# Altium PCB PCB.ST_LINK.FR.PcbDoc
Units mm, origin at the board's own origin, x right, y up, seen from the top; angles counter-clockwise.
Board outline 167.13 x 113.79 mm, 2 copper layers (Top Layer, Bottom Layer); 68 components, 53 nets, 201 pads, 24 vias.
Unrouted connection lines stored in the file: 45.
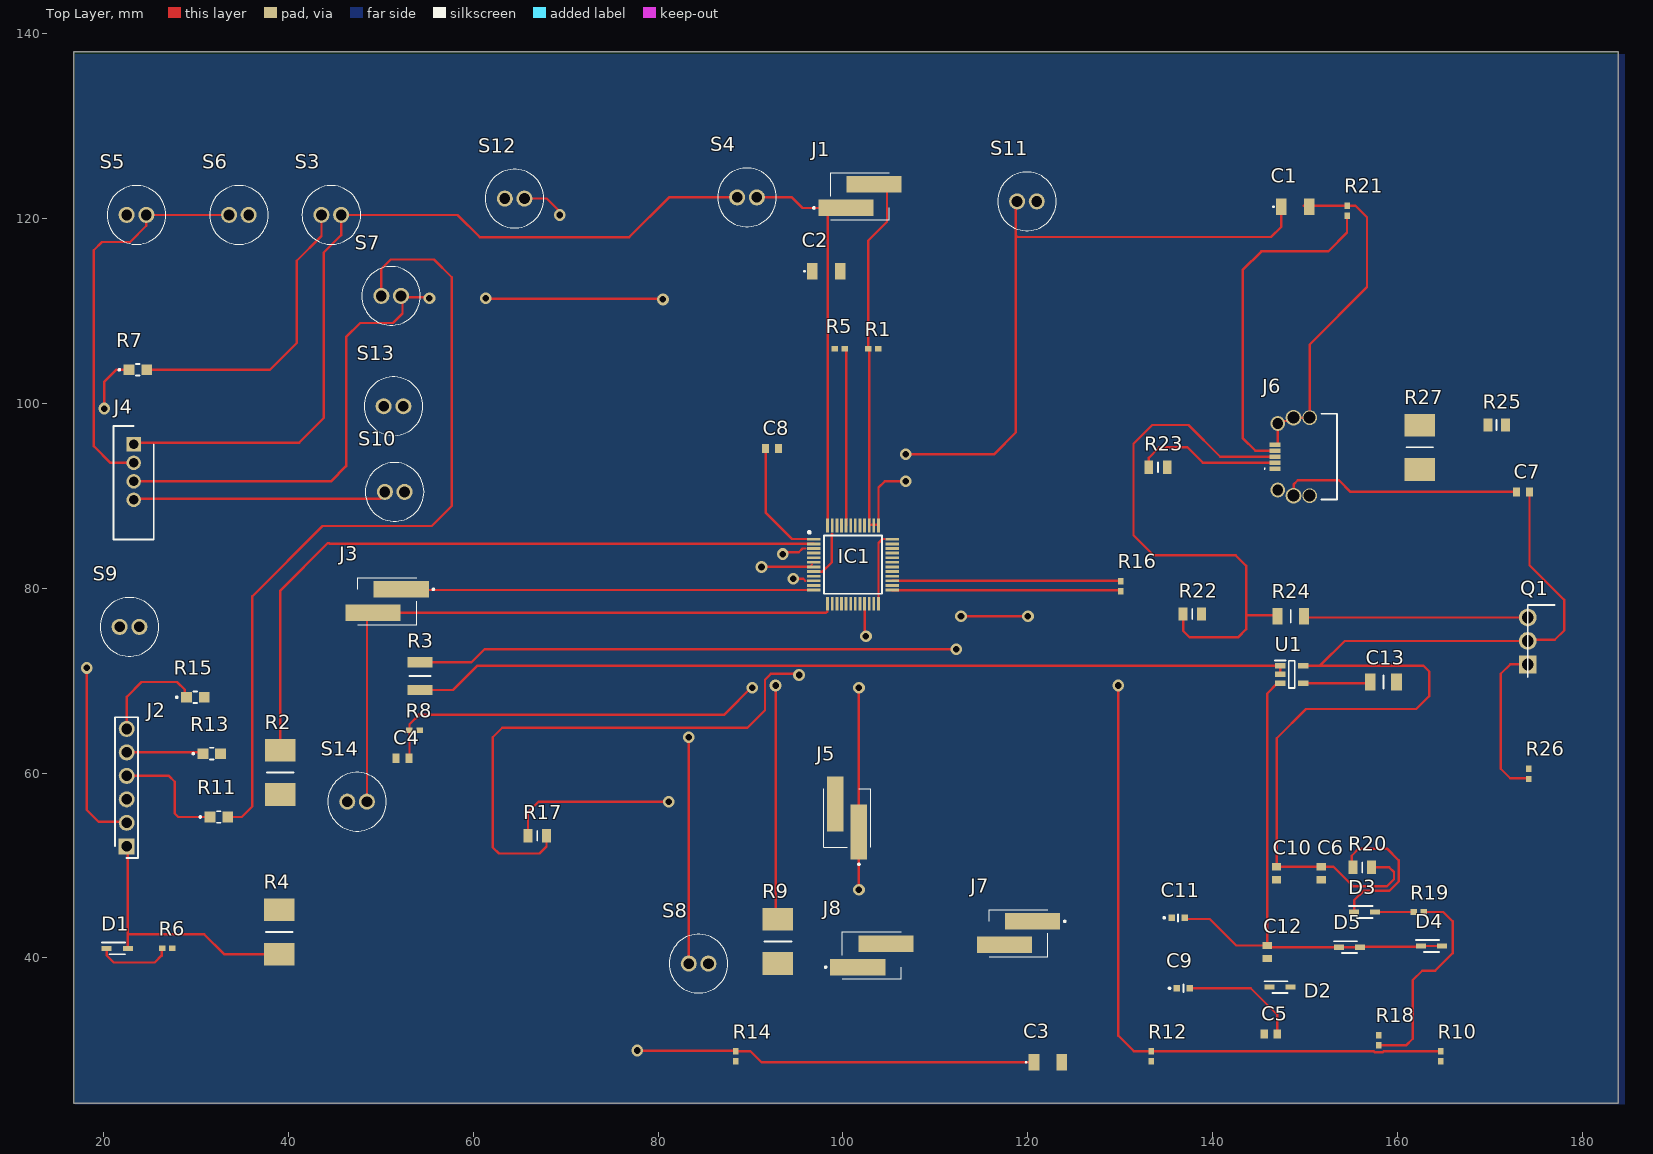
[diagram p0: Top Layer view]
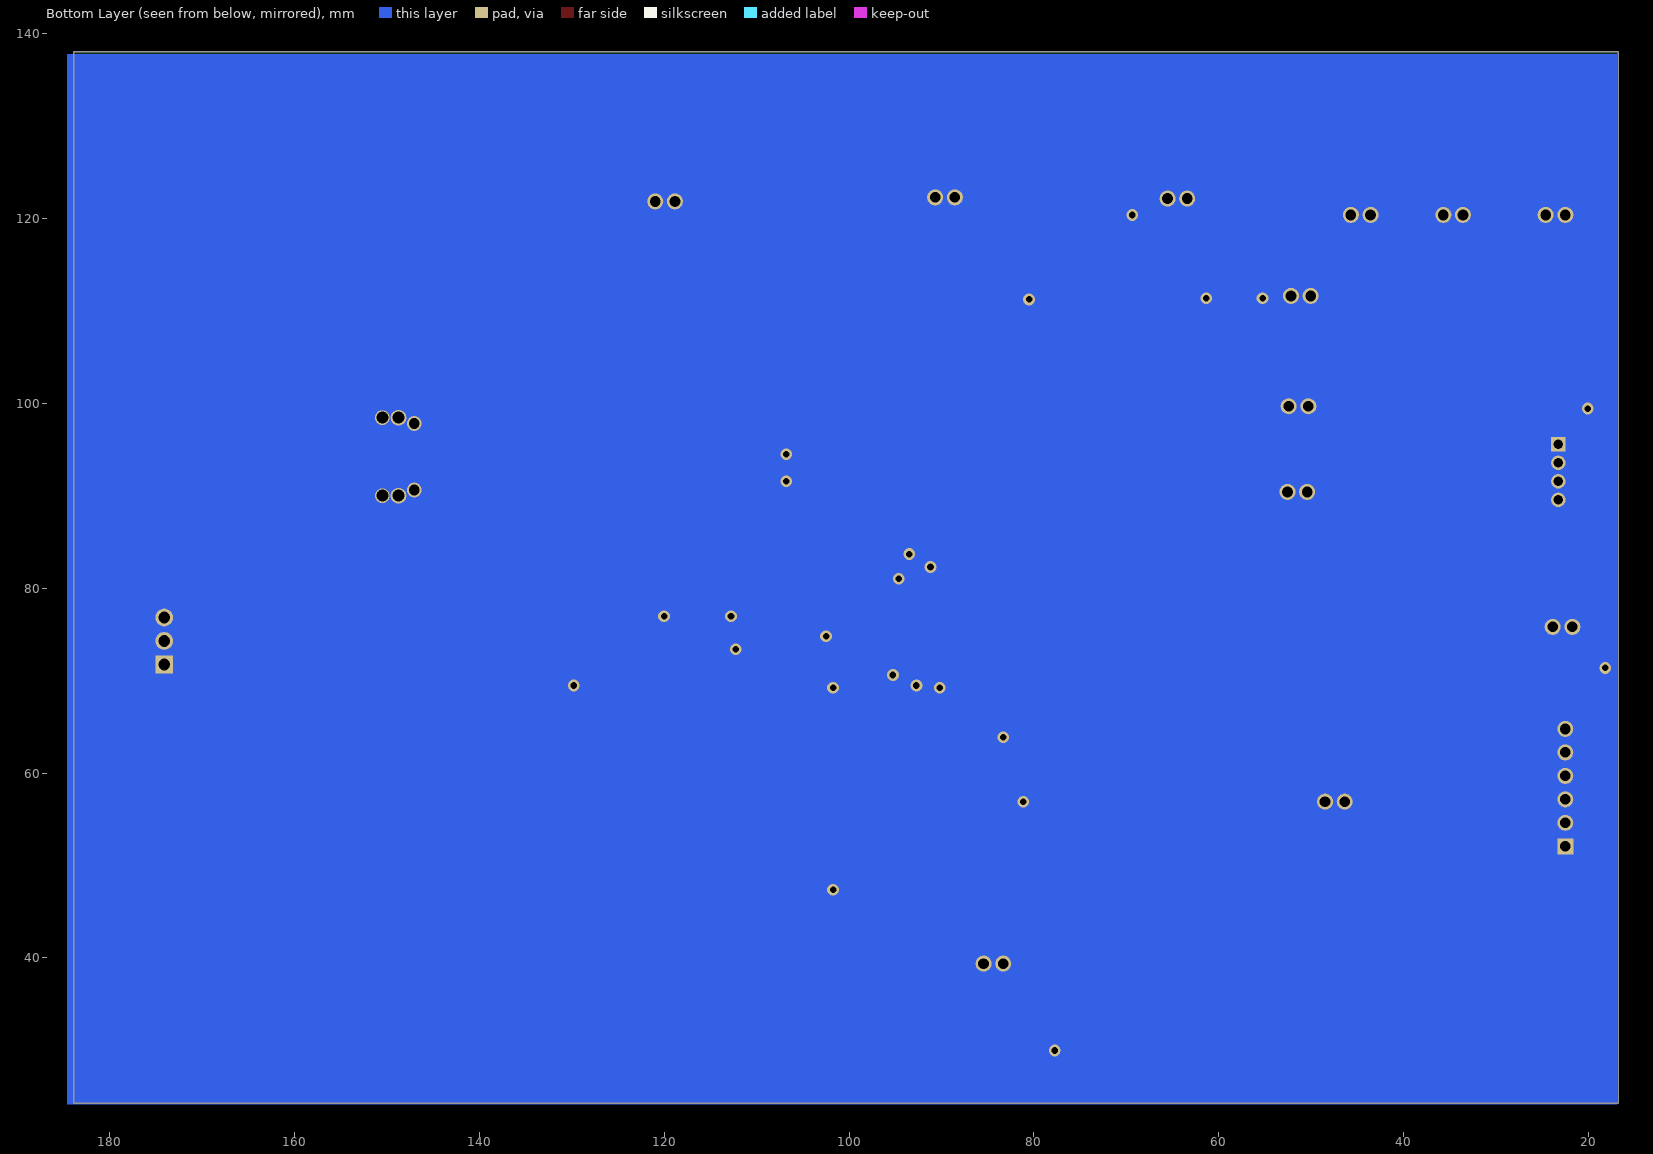
[diagram p1: Bottom Layer view, seen from below]
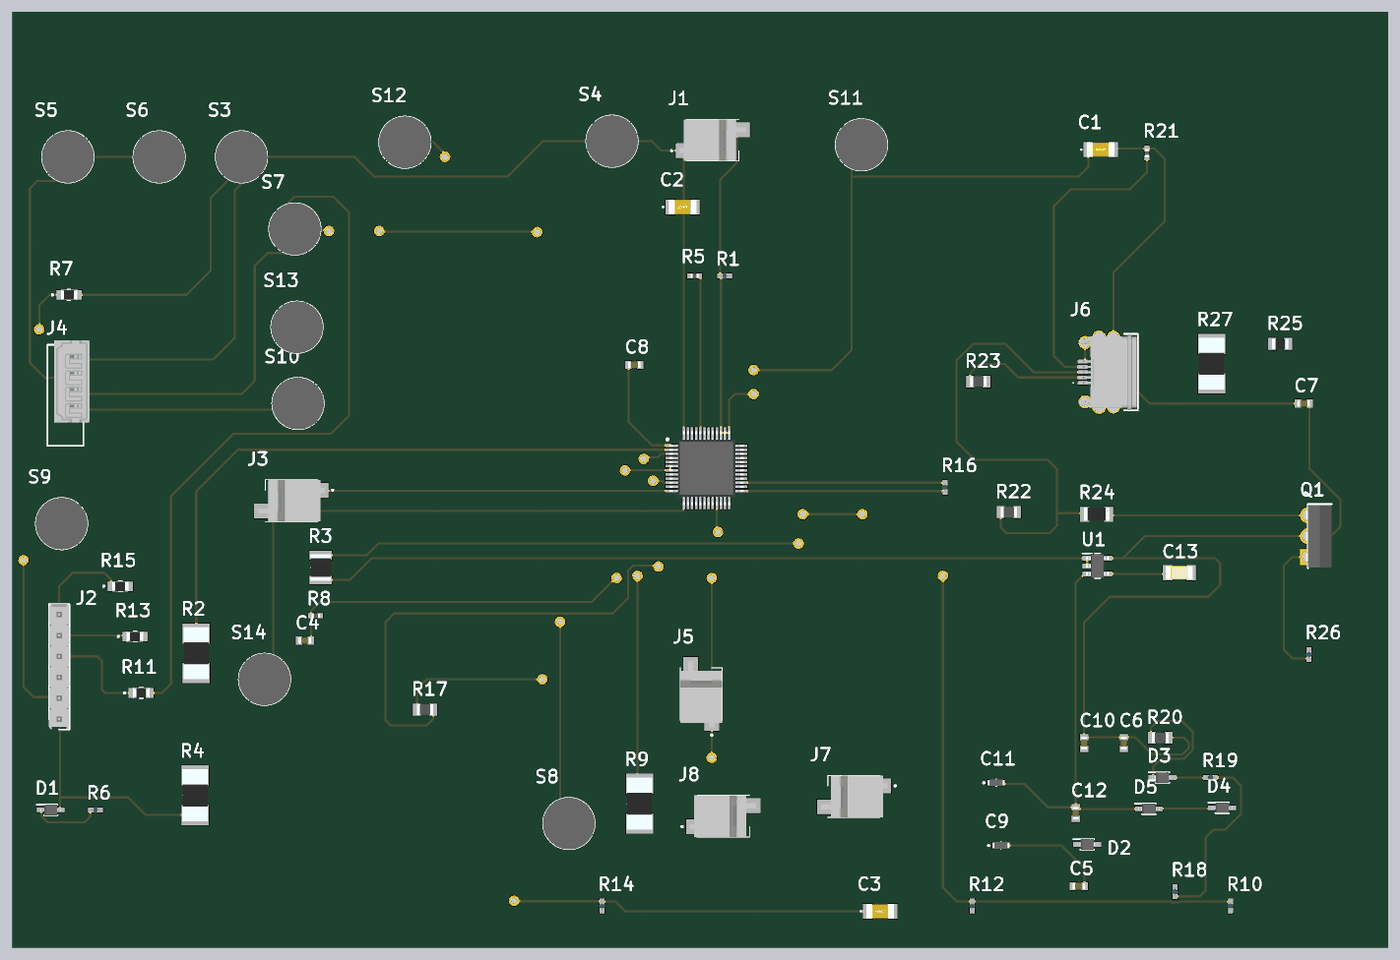
[diagram p2: 3D render of the assembled board from above, using the file's embedded part models]

## Layer stack, top to bottom
Top Solder: solder mask 0.0102, Solder Resist, Dk 3.5
Top Layer: signal copper 0.0356
Dielectric 1: dielectric 0.32, FR-4, Dk 4.8
Bottom Layer: signal copper 0.0356
Bottom Solder: solder mask 0.0102, Solder Resist, Dk 3.5

## Board outline
16.764,24.257 16.764,138.049 183.896,138.049 183.896,24.257

## Design rules (kind name [scope] priority, off if disabled: settings)
Clearance [All] p1: gap=0.254 ignorepadtopadclearanceinfootprint=FALSE
PolygonConnect [All] p1: connectstyle=Relief reliefconductorwidth=0.254 reliefentries=4 polygonreliefangle="90 Angle" airgapwidth=0.254
RoutingVias [All] p1: holewidth=0.711 width=1.27 viastyle="Through Hole" minholewidth=0.711 minwidth=1.27 maxholewidth=0.711 maxwidth=1.27
SolderMaskExpansion [All] p1: expansion=0.102 istentingtop=FALSE
Width [All] p1: maxlimit=0.254 minlimit=0.254 preferedwidth=0.254
30 further rules are at their usual default settings.

## Components (designator, comment, footprint, x,y, rotation, side; value= is the part's Value field where it differs from the comment)
C1 "C1206C200KCGACTU" C1206 148.947,121.285 r0 top
C2 "C1206C200KCGACTU" C1206 98.195,114.3 r0 top
C3 "C1206C200KCGACTU" C1206 122.174,28.702 r0 top
C4 "06035C104K4T4A" CAPC1608X90N 52.324,61.595 r0 top
C5 "06035C104K4T4A" CAPC1608X90N 146.304,31.75 r0 top
C6 "06035C104K4T4A" CAPC1608X90N 151.765,49.149 r90 top
C7 "06035C104K4T4A" CAPC1608X90N 173.609,90.424 r0 top
C8 "06035C104K4T4A" CAPC1608X90N 92.329,95.123 r180 top
C9 "MAJCT168BB7105KTEA01" MAJx16 136.844,36.703 r0 top
C10 "06035C104K4T4A" CAPC1608X90N 146.939,49.149 r90 top
C11 "MAJCT168BB7105KTEA01" MAJx16 136.271,44.323 r0 top
C12 "06035C104K4T4A" CAPC1608X90N 145.923,40.64 r90 top
C13 "KGM31GCG2J103JU" CAPC3316X145N 158.496,69.85 r0 top
D1 "BAT60JFILM" SOD2513X117N 21.46,41.021 r0 top
D2 "BAT60JFILM" SOD2513X117N 147.317,36.83 r0 top
D3 "BAT60JFILM" SOD2513X117N 156.464,44.958 r0 top
D4 "BAT60JFILM" SOD2513X117N 163.7,41.275 r0 top
D5 "BAT60JFILM" SOD2513X117N 154.81,41.148 r0 top
IC1 "STM32F103CBT6" QFP50P900X900X160-48N 101.092,82.55 r0 top
J1 "3-647166-2" 36471662 101.854,122.428 r270 top
J2 "22-28-4062" HDRV6W66P0X254_1X6_1524X249X838P 22.479,52.07 r90 top
J3 "3-647166-2" 36471662 50.677,78.613 r90 top
J4 "53014-0410" SHDR4W60P0X200_1X4_1200X435X1000P 23.241,95.567 r90 top
J5 "3-647166-2" 36471662 100.457,55.122 r0 top
J6 "204926-1103" 2049261103 149.987,94.234 r90 top
J7 "3-647166-2" 36471662 119.003,42.672 r90 top
J8 "3-647166-2" 36471662 103.124,40.259 r270 top
Q1 "BD139" TO254P290X760X1320-3P 174.117,71.755 r90 top
R1 "MCS04020D4701BE000" RESC1005X37N 103.293,105.918 r0 top
R2 "CRM2512QJW-103ELF" RESC6331X80N 39.116,60.071 r90 top
R3 "CRCW12102K70FKEAHP" RESC3225X70N 54.229,70.485 r90 top
R4 "CRM2512QJW-103ELF" RESC6331X80N 38.989,42.799 r90 top
R5 "SFR01MZPF1003" RESC1005X40N 99.653,105.918 r0 top
R6 "MCS04020C1000FE000" RESC1005X37N 26.882,41.021 r0 top
R7 "ERA-6AHD220V" ERA6AEB1020V 23.683,103.632 r0 top
R8 "SFR01MZPF1003" RESC1005X40N 53.636,64.643 r0 top
R9 "CRM2512QJW-103ELF" RESC6331X80N 92.964,41.783 r90 top
R10 "MCS04020D4701BE000" RESC1005X37N 164.719,29.337 r90 top
R11 "ERA-6AHD220V" ERA6AEB1020V 32.451,55.245 r0 top
R12 "MCS04020D4701BE000" RESC1005X37N 133.35,29.337 r90 top
R13 "ERA-6AHD220V" ERA6AEB1020V 31.684,62.103 r0 top
R14 "MCS04020C1000FE000" RESC1005X37N 88.392,29.337 r90 top
R15 "ERA-6AHD220V" ERA6AEB1020V 29.906,68.199 r0 top
R16 "MCS04020C1000FE000" RESC1005X37N 130.048,80.222 r90 top
R17 "WSL080500000ZEA9" RESC2013X84N 66.913,53.213 r0 top
R18 "MCS04020C1000FE000" RESC1005X37N 157.988,31.073 r90 top
R19 "MCS04020C1000FE000" RESC1005X37N 162.306,44.958 r180 top
R20 "WSL080500000ZEA9" RESC2013X84N 156.194,49.784 r0 top
R21 "SFR01MZPF1003" RESC1005X40N 154.559,120.862 r90 top
R22 "WSL080500000ZEA9" RESC2013X84N 137.811,77.216 r0 top
R23 "WSL080500000ZEA9" RESC2013X84N 134.096,93.091 r0 top
R24 "CRCW12061K50FKEAHP" RESC3116X65N 148.463,76.962 r0 top
R25 "TNPW080536K0BEEA" RESC2012X55N 170.749,97.663 r0 top
R26 "MCS04020C1000FE000" RESC1005X37N 174.244,59.902 r90 top
R27 "CRM2512QJW-103ELF" RESC6331X80N 162.433,95.25 r90 top
S3 "8631CQD2" 8631CQD2 43.561,120.396 r0 top
S4 "8631CQD2" 8631CQD2 88.548,122.301 r0 top
S5 "8631CQD2" 8631CQD2 22.479,120.396 r0 top
S6 "8631CQD2" 8631CQD2 33.557,120.396 r0 top
S7 "8631CQD2" 8631CQD2 50.038,111.633 r0 top
S8 "8631CQD2" 8631CQD2 83.312,39.37 r0 top
S9 "8631CQD2" 8631CQD2 21.717,75.819 r0 top
S10 "8631CQD2" 8631CQD2 50.419,90.424 r0 top
S11 "8631CQD2" 8631CQD2 120.975,121.864 r180 top
S12 "8631CQD2" 8631CQD2 63.402,122.174 r0 top
S13 "8631CQD2" 8631CQD2 50.292,99.695 r0 top
S14 "8631CQD2" 8631CQD2 46.355,56.896 r0 top
U1 "LD3985M33R" SOT95P280X145-5N 148.57,70.678 r0 top

## Footprints (in the part's own frame and the unit in brackets; to place one, negate y for a bottom-side part, rotate by r counter-clockwise, add the part's x,y. Pads: shape width x height; smd on the part's side, far side on the other; paste and mask are expansions set on the pad)
8631CQD2 [mm]
  round 1.74 hole 1.16: 1(0,0) 2(2.13,0)
  silkscreen extent -2.11,-3.17 4.24,3.17, body extent -2.11,-3.17 4.24,3.17, height 14.03
36471662 [mm]
  rect 1.78x5.97 smd: 1(1.27,-1.52) 2(-1.27,1.52)
  silkscreen extent -2.54,-5.1 2.54,3.18, body extent -2.54,-4.08 2.54,4, height 10.55
2049261103 [mm]
  rect 0.45x1.2 smd: 1(-1.3,3.225) 2(-0.65,3.225) 3(0,3.225) 4(0.65,3.225) 5(1.3,3.225)
  round 1.6 hole 1.17: MH1(-3.6,2.925) MH2(3.6,2.925)
  round 1.7 hole 1.3: MH3(-4.225,1.225) MH4(4.225,1.225)
  round 1.6 hole 1.3: MH5(-4.225,-0.525) MH6(4.225,-0.525)
  silkscreen extent -4.65,-3.47 4.65,4.4, body extent -4.65,-3.32 4.65,3.68, height 3.83
C1206 [mm]
  rect 1.15x1.8 smd: 1(-1.5,0) 2(1.5,0)
  silkscreen extent -2.4,-0.05 -2.3,0.05, body extent -1.7,-0.9 1.7,0.9, height 1.75
CAPC1608X90N [mm]
  rect 0.78x0.99 smd: 1(-0.7,0) 2(0.7,0)
  body extent -0.8,-0.41 0.8,0.41, height 0.9
CAPC3316X145N [mm]
  rect 1.17x1.82 smd: 1(-1.42,0) 2(1.42,0)
  silkscreen extent 0,-0.7 0,0.7, body extent -1.65,-0.8 1.65,0.8, height 1.68
ERA6AEB1020V [mm]
  rect 1.15x1.15 smd: 1(-0.95,0) 2(0.95,0)
  silkscreen extent -2.1,-0.63 0.2,0.63, body extent -1,-0.63 1,0.63, height 0.5
HDRV6W66P0X254_1X6_1524X249X838P [mm]
  rect 1.725x1.725 hole 1.15: 1(0,0)
  round 1.725 hole 1.15: 2(2.54,0) 3(5.08,0) 4(7.62,0) 5(10.16,0) 6(12.7,0)
  silkscreen extent -1.27,-1.24 13.97,1.24, body extent -1.27,-1.24 13.97,1.24, height 9.65
MAJx16 [mm]
  rect 0.7x0.7 smd: 1(-0.7,0) 2(0.7,0)
  silkscreen extent -1.6,-0.4 0,0.4, body extent -0.98,-0.4 0.98,0.4, height 0.9
QFP50P900X900X160-48N [mm]
  rect 1.475x0.3 smd: 1(-4.238,2.75) 2(-4.238,2.25) 3(-4.238,1.75) 4(-4.238,1.25) 5(-4.238,0.75) 6(-4.238,0.25) 7(-4.238,-0.25) 8(-4.238,-0.75) 9(-4.238,-1.25) 10(-4.238,-1.75) 11(-4.238,-2.25) 12(-4.238,-2.75) 25(4.238,-2.75) 26(4.238,-2.25) 27(4.238,-1.75) 28(4.238,-1.25) 29(4.238,-0.75) 30(4.238,-0.25) 31(4.238,0.25) 32(4.238,0.75) 33(4.238,1.25) 34(4.238,1.75) 35(4.238,2.25) 36(4.238,2.75)
  rect 0.3x1.475 smd: 13(-2.75,-4.238) 14(-2.25,-4.238) 15(-1.75,-4.238) 16(-1.25,-4.238) 17(-0.75,-4.238) 18(-0.25,-4.238) 19(0.25,-4.238) 20(0.75,-4.238) 21(1.25,-4.238) 22(1.75,-4.238) 23(2.25,-4.238) 24(2.75,-4.238) 37(2.75,4.238) 38(2.25,4.238) 39(1.75,4.238) 40(1.25,4.238) 41(0.75,4.238) 42(0.25,4.238) 43(-0.25,4.238) 44(-0.75,4.238) 45(-1.25,4.238) 46(-1.75,4.238) 47(-2.25,4.238) 48(-2.75,4.238)
  silkscreen extent -4.85,-3.15 3.15,3.62, body extent -4.5,-4.5 4.5,4.5, height 1.6
RESC1005X37N [mm]
  rect 0.7x0.6 smd: 1(-0.55,0) 2(0.55,0)
  body extent -0.5,-0.25 0.5,0.25, height 0.32
RESC1005X40N [mm]
  rect 0.7x0.6 smd: 1(-0.55,0) 2(0.55,0)
  body extent -0.5,-0.25 0.5,0.25, height 0.4
RESC2012X55N [mm]
  rect 1x1.45 smd: 1(-0.95,0) 2(0.95,0)
  silkscreen extent 0,-0.53 0,0.53, body extent -1,-0.63 1,0.63, height 0.55
RESC2013X84N [mm]
  rect 0.95x1.45 smd: 1(-1,0) 2(1,0)
  silkscreen extent 0,-0.54 0,0.54, body extent -1.01,-0.64 1.01,0.64, height 0.36
RESC3116X65N [mm]
  rect 1.1x1.8 smd: 1(-1.45,0) 2(1.45,0)
  silkscreen extent 0,-0.7 0,0.7, body extent -1.55,-0.8 1.55,0.8, height 0.65
RESC3225X70N [mm]
  rect 1.1x2.7 smd: 1(-1.5,0) 2(1.5,0)
  silkscreen extent 0,-1.15 0,1.15, body extent -1.6,-1.25 1.6,1.25, height 0.7
RESC6331X80N [mm]
  rect 2.45x3.3 smd: 1(-2.4,0) 2(2.4,0)
  silkscreen extent 0,-1.45 0,1.45, body extent -3.15,-1.55 3.15,1.55, height 0.8
SHDR4W60P0X200_1X4_1200X435X1000P [mm]
  rect 1.575x1.575 hole 1.05: 1(0,0)
  round 1.575 hole 1.05: 2(-2,0) 3(-4,0) 4(-6,0)
  silkscreen extent -10.3,-2.17 2,2.17, body extent -7.45,-2.96 2.55,1.39, height 5.85
SOD2513X117N [mm]
  rect 1.085x0.55 smd: 1(-1.14,0) 2(1.14,0)
  silkscreen extent -1.68,-0.64 0.83,0.64, body extent -1.25,-0.64 1.25,0.64, height 1.17
SOT95P280X145-5N [mm]
  rect 1.15x0.6 smd: 1(-1.25,0.95) 2(-1.25,0) 3(-1.25,-0.95) 4(1.25,-0.95) 5(1.25,0.95)
  silkscreen extent -1.83,-1.48 0.33,1.5, body extent -1.4,-1.48 1.4,1.48, height 1.45
TO254P290X760X1320-3P [mm]
  rect 1.92x1.92 hole 1.28: 1(0,0)
  round 1.92 hole 1.28: 2(2.54,0) 3(5.08,0)
  silkscreen extent -1.36,-2.9 6.44,0, body extent -1.26,-2.9 6.34,0.26, height 12.92

## Part data
C1 C2 C3: "Capacitor", Manufacturer_Name=KEMET, Datasheet Link=https://content.kemet.com/datasheets/KEM_C1009_C0G_HV_SMD.pdf, Manufacturer_Part_Number=C1206C200KCGACTU
C4 C5 C6 C7 C8 C10 C12: "Capacitor", Manufacturer_Name="Kyocera AVX", Mouser Part Number=581-06035C104K4T4A, Arrow Part Number=06035C104K4T4A, Arrow Price/Stock=https://www.arrow.com/en/products/06035c104k4t4a/avx, Datasheet Link=https://componentsearchengine.com/Datasheets/1/06031A100FAT2A.pdf, Height=0.9mm, Manufacturer_Part_Number=06035C104K4T4A, Mouser Price/Stock=https://www.mouser.co.uk/ProductDetail/KYOCERA-AVX/06035C104K4T4A?qs=NBj5Hwer2CEXBYKT%252BbuSBA%3D%3D
C9 C11: "Capacitor", Manufacturer_Name="TAIYO YUDEN", Datasheet Link=https://ds.yuden.co.jp/TYCOMPAS/or/detail?pn=MAJCT168BB7105KTEA01, Height=0.8mm, Manufacturer_Part_Number=MAJCT168BB7105KTEA01
C13: "Capacitor", Manufacturer_Name="Kyocera AVX", Mouser Part Number=581-KGM31GCG2J103JU, Datasheet Link=https://datasheets.kyocera-avx.com/HVKGM.pdf, Height=1.45mm, Manufacturer_Part_Number=KGM31GCG2J103JU, Mouser Price/Stock=https://www.mouser.co.uk/ProductDetail/KYOCERA-AVX/KGM31GCG2J103JU?qs=63Lh8XYXgjt6ivbLeGkCxg%3D%3D
D1 D2 D3 D4 D5: "Schottky Diode", Manufacturer_Name=STMicroelectronics, Mouser Part Number=511-BAT60JFILM, Arrow Part Number=BAT60JFILM, Arrow Price/Stock=https://www.arrow.com/en/products/bat60jfilm/stmicroelectronics?region=nac, Datasheet Link=https://www.mouser.jp/datasheet/2/389/cd00001944-1795661.pdf, Height=1.17mm, Manufacturer_Part_Number=BAT60JFILM, Mouser Price/Stock=https://www.mouser.co.uk/ProductDetail/STMicroelectronics/BAT60JFILM?qs=GnFZssByvVVVnMaukcyLZg%3D%3D
IC1: "Integrated Circuit", Manufacturer_Name=STMicroelectronics, Mouser Part Number=511-STM32F103CBT6, Arrow Part Number=STM32F103CBT6, Arrow Price/Stock=https://www.arrow.com/en/products/stm32f103cbt6/stmicroelectronics?region=europe, Datasheet Link=http://www.st.com/st-web-ui/static/active/en/resource/technical/document/datasheet/CD00161566.pdf, Height=1.6mm, Manufacturer_Part_Number=STM32F103CBT6, Mouser Price/Stock=https://www.mouser.co.uk/ProductDetail/STMicroelectronics/STM32F103CBT6?qs=WxFF5lh7QM3goh6GV5Ogig%3D%3D
J1 J3 J5 J7 J8: "Connector", Manufacturer_Name="TE Connectivity", Mouser Part Number=571-3-647166-2, Arrow Part Number=3-647166-2, Arrow Price/Stock=https://www.arrow.com/en/products/3-647166-2/te-connectivity?region=nac, Datasheet Link=https://www.te.com/commerce/DocumentDelivery/DDEController?Action=showdoc&DocId=Customer+Drawing%7F647166%7FR1%7Fpdf%7FEnglish%7FENG_CD_647166_R1.pdf%7F3-647166-2, Height=10.66mm, Manufacturer_Part_Number=3-647166-2, Mouser Price/Stock=https://www.mouser.co.uk/ProductDetail/TE-Connectivity/3-647166-2?qs=xsTFCgGnzbJU1qz6Np9kzA%3D%3D
J2: "Connector", Manufacturer_Name=Molex, Mouser Part Number=538-22-28-4062, Datasheet Link=https://datasheet.datasheetarchive.com/originals/distributors/SFDatasheet-1/sf-00031037.pdf, Height=8.38mm, Manufacturer_Part_Number=22-28-4062, Mouser Price/Stock=https://www.mouser.com/Search/Refine.aspx?Keyword=538-22-28-4062
J4: "Connector", Manufacturer_Name=Molex, Mouser Part Number=538-53014-0410, Datasheet Link=https://www.molex.com/pdm_docs/sd/530140410_sd.pdf, Height=10mm, Manufacturer_Part_Number=53014-0410, Mouser Price/Stock=https://www.mouser.co.uk/ProductDetail/Molex/53014-0410?qs=TLs3Kb%252BkMqKk8s1WRHwRGw%3D%3D
J6: "Connector", Manufacturer_Name=Molex, Mouser Part Number=538-204926-1103, Arrow Part Number=204926-1103, Arrow Price/Stock=https://www.arrow.com/en/products/204926-1103/molex?region=nac, Datasheet Link=https://www.molex.com/content/dam/molex/molex-dot-com/products/automated/en-us/salesdrawingpdf/204/204926/2049261103_sd.pdf, Height=4.65mm, Manufacturer_Part_Number=204926-1103, Mouser Price/Stock=https://www.mouser.co.uk/ProductDetail/Molex/204926-1103?qs=55YtniHzbhBOQihiQOeiLg%3D%3D
Q1: "Transistor BJT NPN", Manufacturer_Name=STMicroelectronics, Mouser Part Number=511-BD139, Arrow Part Number=BD139, Arrow Price/Stock=https://www.arrow.com/en/products/bd139/stmicroelectronics?region=europe, Datasheet Link=http://www.st.com/web/en/resource/technical/document/datasheet/CD00001225.pdf, Height=2.9mm, Manufacturer_Part_Number=BD139, Mouser Price/Stock=https://www.mouser.co.uk/ProductDetail/STMicroelectronics/BD139?qs=ljbEvF4DwOPW%2FLxHSWYMMA%3D%3D
R1 R10 R12: "Resistor", Manufacturer_Name=Vishay, Mouser Part Number=594-MCS04020D4701BE0, Datasheet Link=http://www.vishay.com/docs/28705/mcx0x0xpro.pdf, Height=0.37mm, Manufacturer_Part_Number=MCS04020D4701BE000, Mouser Price/Stock=https://www.mouser.co.uk/ProductDetail/Vishay-Beyschlag/MCS04020D4701BE000?qs=ft9OtscSA3%252BR0DpF5QqL2Q%3D%3D
R2 R4 R9 R27: "Resistor", Manufacturer_Name=Bourns, Mouser Part Number=652-CRM2512QJW-103E, Arrow Part Number=CRM2512QJW-103ELF, Arrow Price/Stock=https://www.arrow.com/en/products/crm2512qjw-103elf/bourns?region=nac, Datasheet Link=http://www.bourns.com/data/global/pdfs/CRM0805_1206_2010.pdf, Height=0.8mm, Manufacturer_Part_Number=CRM2512QJW-103ELF, Mouser Price/Stock=https://www.mouser.co.uk/ProductDetail/Bourns/CRM2512QJW-103ELF?qs=8Wlm6%252BaMh8Rzg3bRHdWGsA%3D%3D
R3: "Resistor", Manufacturer_Name=Vishay, Mouser Part Number=71-CRCW12102K70FKEAH, Datasheet Link=http://componentsearchengine.com/Datasheets/1/CRCW12102K70FKEAHP.pdf, Height=0.7mm, Manufacturer_Part_Number=CRCW12102K70FKEAHP, Mouser Price/Stock=https://www.mouser.co.uk/ProductDetail/Vishay-Dale/CRCW12102K70FKEAHP?qs=OAzHGkhREL0m0%252BU1n6AaAg%3D%3D
R5 R8 R21: "Resistor", Manufacturer_Name="ROHM Semiconductor", Mouser Part Number=755-SFR01MZPF1003, Datasheet Link=https://fscdn.rohm.com/en/products/databook/datasheet/passive/resistor/chip_resistor/sfr-e.pdf, Height=0.4mm, Manufacturer_Part_Number=SFR01MZPF1003, Mouser Price/Stock=https://www.mouser.co.uk/ProductDetail/ROHM-Semiconductor/SFR01MZPF1003?qs=Mv7BduZupUj2RFL5gMaKTg%3D%3D
R6 R14 R16 R18 R19 R26: "Resistor", Manufacturer_Name=Vishay, Mouser Part Number=594-MCS04020C1000FE0, Arrow Part Number=MCS04020C1000FE000, Arrow Price/Stock=https://www.arrow.com/en/products/mcs04020c1000fe000/vishay, Datasheet Link=http://www.vishay.com/docs/28705/mcx0x0xpro.pdf, Height=0.37mm, Manufacturer_Part_Number=MCS04020C1000FE000, Mouser Price/Stock=https://www.mouser.co.uk/ProductDetail/Vishay-Beyschlag/MCS04020C1000FE000?qs=7ZE6F4QMOBYkwvQlfbkT8w%3D%3D
R7 R11 R13 R15: "Resistor", Manufacturer_Name=Panasonic, Mouser Part Number=667-ERA-6AHD220V, Datasheet Link=https://industrial.panasonic.com/cdbs/www-data/pdf/RDM0000/AOA0000C307.pdf, Height=0.6mm, Manufacturer_Part_Number=ERA-6AHD220V, Mouser Price/Stock=https://www.mouser.co.uk/ProductDetail/Panasonic/ERA-6AHD220V/?qs=MNPzkKEzRtQTWqg2JSKn2A%3D%3D
R17 R20 R22 R23: "Resistor", Manufacturer_Name=Vishay, Mouser Part Number=71-WSL080500000ZEA9, Arrow Part Number=WSL080500000ZEA9, Arrow Price/Stock=https://www.arrow.com/en/products/wsl080500000zea9/vishay?region=nac, Datasheet Link=https://ad.componentsearchengine.com/Datasheets/2/WSL080500000ZEA9.pdf, Height=0.838mm, Manufacturer_Part_Number=WSL080500000ZEA9, Mouser Price/Stock=https://www.mouser.co.uk/ProductDetail/Vishay-Dale/WSL080500000ZEA9?qs=f1l5vAGoKgsImKS87N8TmQ%3D%3D
R24: "Resistor", Manufacturer_Name=Vishay, Mouser Part Number=71-CRCW12061K50FKEAH, Arrow Part Number=CRCW12061K50FKEAHP, Arrow Price/Stock=https://www.arrow.com/en/products/crcw12061k50fkeahp/vishay?region=nac, Datasheet Link=http://componentsearchengine.com/Datasheets/1/CRCW12061K50FKEAHP.pdf, Height=0.65mm, Manufacturer_Part_Number=CRCW12061K50FKEAHP, Mouser Price/Stock=https://www.mouser.co.uk/ProductDetail/Vishay-Dale/CRCW12061K50FKEAHP?qs=k2%2FDWSARqgEwHXAQbL4aEg%3D%3D
R25: "Resistor", Manufacturer_Name=Vishay, Datasheet Link=https://www.vishay.com/docs/31006/tnpw.pdf, Height=0.55mm, Manufacturer_Part_Number=TNPW080536K0BEEA
S3 S4 S5 S6 S7 S8 S9 S10 S11 S12 S13 S14: "Switch (2-Pin Push)", Manufacturer_Name="C & K COMPONENTS", Mouser Part Number=611-8631-261, Datasheet Link=https://www.ckswitches.com/media/1396/8600.pdf, Height=13.93mm, Manufacturer_Part_Number=8631CQD2, Mouser Price/Stock=https://www.mouser.co.uk/ProductDetail/CK/8631CQD2?qs=ktcBc77oICXe9iPhfEwnkA%3D%3D
U1: "Integrated Circuit", Manufacturer_Name=STMicroelectronics, Mouser Part Number=511-LD3985M33R, Arrow Part Number=LD3985M33R, Arrow Price/Stock=https://www.arrow.com/en/products/ld3985m33r/stmicroelectronics?region=europe, Datasheet Link=http://www.st.com/st-web-ui/static/active/en/resource/technical/document/datasheet/CD00003395.pdf, Height=1.45mm, Manufacturer_Part_Number=LD3985M33R, Mouser Price/Stock=https://www.mouser.co.uk/ProductDetail/STMicroelectronics/LD3985M33R?qs=22WmWNTp1rrPOccVv4HZ7A%3D%3D

## Via types
v1: diameter 1.27, hole 0.711, Top Layer to Bottom Layer, 24 vias

## Nets (pads, with @x,y where several pads share a name; then routed paths per layer and width w, separated by ;. In a path a pad name is that pad's centre, name@x,y a point inside that pad or via, vN(x,y) a via of type N, cw(c..) or ccw(c..) an arc to the next point about the centre after c; other vN are vias at no path point)
+3V3: R10.1
+3V3_ST_LINK: C5.2 C6.2 C7.2 C8.2 C9.2 C10.2 IC1.1 IC1.9 IC1.24 IC1.36 IC1.48 J1.1 Q1.2 R17.2 R20.2 S4.2 U1.5 | length 261.4
  Top Layer w0.254: R17.2 67.913,52.038 67.161,51.286 62.76,51.286 62.103,51.943 62.103,63.881 63.119,64.897 89.662,64.897 91.567,66.802 91.567,70.104 92.202,70.739 v1@94.996,70.739 ; S4.2 94.488,122.301 95.631,121.158 J1.1@99.105,121.158 ; C8.2 91.629,88.203 94.501,85.331 IC1.1@96.774,85.331 ; IC1.48 98.342,120.395 J1.1@99.105,121.158 ; J1.1 J1.1@99.105,121.158 ; IC1.24 103.842,84.88 104.293,85.331 104.521,85.331 ; C9.2 144.145,36.703 147.004,33.844 C5.2 ; U1.5 151.638,71.628 ; R20.2 159.131,49.784 159.639,49.276 159.639,48.514 158.877,47.752 155.194,47.752 153.097,49.849 C6.2 C10.2 146.939,63.754 150.114,66.929 162.052,66.929 163.449,68.326 163.449,70.993 162.814,71.628 151.638,71.628 ; C7.2 174.309,82.485 178.054,78.74 178.054,75.438 177.038,74.422 174.244,74.422 Q1.2 154.305,74.295 151.638,71.628
  Bottom Layer w0.254: v1(95.25,70.612) 95.25,76.708 93.599,78.359 93.599,81.447 94.194,82.042 95.123,82.042 95.758,81.407 96.393,81.407 96.52,81.28 96.774,81.28
+3V_ST_LINK: R8.2
E5V: C11.2 C12.2 D4.1 D4.2 D5.1 D5.2 R3.1 U1.1 U1.2 U1.3 | length 153.5
  Top Layer w0.254: R3.1 57.809,68.985 60.452,71.628 U1.1 U1.2 ; C11.2 137.098,44.196 139.7,44.196 142.556,41.34 C12.2 ; U1.3 147.045,69.728 145.923,68.606 C12.2 ; D4.2 D4.1 162.496,41.212 156.014,41.212 D5.2 D5.1 146.115,41.148 C12.2
GND: C1.2 C2.2 C3.2 C4.1 C5.1 C6.1 C7.1 C8.1 C9.1 C10.1 C11.1 C12.1 C13.2 D2.1 D2.2 IC1.8 IC1.20 IC1.23 IC1.35 IC1.47 J2.3 J5.2 J6.5 J6.MH2 J6.MH3 J6.MH4 J6.MH5 J6.MH6 J7.1 J7.2 J8.1 J8.2 R1.2 R2.1 R4.2 R5.1 R9.1 R12.1 R18.2 R21.2 S8.2 S11.1 | length 69.5
  Top Layer w0.254: IC1.8 97.802,81.8 98.806,82.804 98.806,85.826 98.842,85.862 ; J6.5 146.964,95.534 147.062,95.632 J6.MH2 147.066,97.83 147.066,97.79 147.368,98.092 148.003,98.092 148.371,98.459 J6.MH4 J6.MH6 150.512,106.38 156.718,112.586 156.718,120.142 155.448,121.412 R21.2 149.86,121.412 ; J6.MH3 148.771,90.018 148.771,91.24 149.225,91.694 153.67,91.694 154.94,90.424 C7.1
NetC1_1: C1.1 C4.2 IC1.6 IC1.7 R8.1 S11.2 | length 158.2
  Top Layer w0.254: C4.2 53.086,61.657 R8.1 53.086,65.278 54.102,66.294 87.122,66.294 v1@90.297,69.469 ; v1(91.186,82.296) 91.221,82.331 96.428,82.331 96.647,82.55 ; v1@107.188,94.488 116.332,94.488 118.718,96.874 118.718,118.159 ; S11.2@118.692,122.063 S11.2@118.874,122.245 ; S11.2@118.718,121.483 118.718,118.159 ; C1.1 147.447,119.126 146.331,118.01 118.867,118.01 118.718,118.159
  Bottom Layer w0.254: v1(90.17,69.215) 90.17,81.788 ; v1@90.678,82.296 90.17,81.788 ; v1(106.807,94.488) 92.583,94.488 90.17,92.075 90.17,81.788
NetC2_1: C2.1 IC1.5
NetC3_1: C3.1 R14.2 S12.2 | length 144.8
  Top Layer w0.254: S12.2 67.945,122.174 v1@69.215,120.904 ; v1(77.724,29.972) 77.766,29.93 88.349,29.93 R14.2 90.001,29.887 91.186,28.702 C3.1
  Bottom Layer w0.254: v1(69.342,120.396) 69.342,32.385 71.628,30.099 v1@77.47,30.099
NetC13_1: C13.1 U1.4 | length 7.3
  Top Layer w0.254: U1.4 156.954,69.728 C13.1
NetD1_1: D1.1 R6.1 | length 8.1
  Top Layer w0.254: D1.1 20.32,40.259 21.082,39.497 25.527,39.497 26.265,40.235 26.265,40.954 R6.1
NetD1_2: D1.2 J2.1 R4.1 | length 28.4
  Top Layer w0.254: J2.1 22.6,51.949 22.6,42.545 ; D1.2 22.6,42.545 ; R4.1 33.007,40.399 30.861,42.545 22.6,42.545
NetD3_1: D3.1 R20.1 | length 16.5
  Top Layer w0.254: R20.1 155.067,49.911 155.067,51.054 155.829,51.816 158.877,51.816 160.147,50.546 160.147,48.26 159.131,47.244 156.337,47.244 155.324,46.231 D3.1
NetD3_2: D3.2 R19.2 | length 4.2
  Top Layer w0.254: D3.2 R19.2
NetIC1_2: IC1.2 R2.2 | length 77.2
  Top Layer w0.254: R2.2 39.116,79.756 44.218,84.858 44.429,84.858 44.487,84.8 IC1.2
NetIC1_3: IC1.3 R9.2 | length 42.6
  Top Layer w0.254: v1(92.71,69.469) 92.71,44.437 R9.2 ; v1(93.472,83.693) 93.666,83.887 95.211,83.887 95.616,84.292 95.928,84.292
  Bottom Layer w0.254: v1(92.71,69.469) 92.71,81.788 93.472,82.55 v1(93.472,83.693)
NetIC1_10: IC1.10 R10.2 R12.2 | length 119.2
  Top Layer w0.254: v1(94.615,81.026) 95.702,81.026 95.928,80.8 ; v1(112.776,76.962) v1(120.015,76.962) ; v1(129.794,69.469) 129.794,31.58 131.487,29.887 R12.2 157.435,29.887 157.53,29.792 158.446,29.792 158.541,29.887 R10.2
  Bottom Layer w0.254: v1(94.615,81.026) 94.615,78.74 96.393,76.962 v1(112.776,76.962) ; v1(120.015,76.962) 127.254,76.962 129.794,74.422 v1(129.794,69.469)
NetIC1_12: IC1.12 J3.1 S13.2 | length 67.5
  Top Layer w0.254: J3.1 52.28,79.8 IC1.12
  Bottom Layer w0.254: S13.2 52.578,99.851 52.578,99.949 52.832,99.695 53.721,99.695 54.886,98.53 54.886,80.54 53.721,79.375
NetIC1_13: IC1.13 J3.2 S14.2 | length 69.9
  Top Layer w0.254: S14.2 48.485,76.671 J3.2 98.171,77.343 98.298,77.47 98.311,77.47
NetIC1_21: IC1.21 J5.1 R17.1 | length 75.8
  Top Layer w0.254: R17.1 65.913,55.753 67.056,56.896 v1(81.153,56.896) ; v1(101.727,47.371) J5.1 v1(101.727,69.215) ; IC1.21 102.342,74.95 v1(102.489,74.803)
  Bottom Layer w0.254: v1(81.153,56.896) 93.472,56.896 96.012,54.356 96.012,50.546 98.933,47.625 v1@101.346,47.625 ; v1(101.727,69.215) 102.489,69.977 v1(102.489,74.803)
NetIC1_25: IC1.25 R16.1 | length 24.8
  Top Layer w0.254: IC1.25 105.353,79.777 129.943,79.777 R16.1
NetIC1_27: IC1.27 R16.2 | length 24.7
  Top Layer w0.254: IC1.27 130.02,80.8 R16.2
NetIC1_28: IC1.28
NetIC1_29: IC1.29 R14.1
NetIC1_37: IC1.37 IC1.38 IC1.39 J1.2 R1.1 R3.2 | length 136.9
  Top Layer w0.254: R3.2 59.793,71.985 61.214,73.406 v1@111.76,73.406 ; IC1.39@102.842,86.868 102.842,105.819 R1.1 102.743,117.624 104.775,119.656 104.775,122.935 104.012,123.698 J1.2 ; IC1.39@102.873,86.868 103.819,86.868 IC1.37@103.842,86.845 ; IC1.37 IC1.37@103.842,86.845 ; v1(106.807,91.567) 104.521,91.567 103.842,90.888 IC1.37@103.842,86.845
  Bottom Layer w0.254: v1(106.807,91.567) 115.697,91.567 116.967,90.297 116.967,74.168 116.205,73.406 v1(112.268,73.406)
NetIC1_44: IC1.44 R5.2 | length 19.2
  Top Layer w0.254: R5.2 100.342,105.779 IC1.44
NetJ2_2: J2.2 R7.1 | length 55
  Top Layer w0.254: v1(18.161,71.374) 18.161,56.007 19.431,54.737 22.352,54.737 J2.2 ; v1@20.066,99.695 20.066,102.362 21.336,103.632 R7.1
  Bottom Layer w0.254: v1(18.161,71.374) 18.161,79.353 18.31,79.502 18.415,79.502 20.066,81.153 v1(20.066,99.441)
NetJ2_4: J2.4 R11.1 | length 12.9
  Top Layer w0.254: J2.4 27.051,59.69 27.686,59.055 27.686,55.626 28.067,55.245 R11.1
NetJ2_5: J2.5 R13.1 | length 8.3
  Top Layer w0.254: J2.5 30.607,62.23 R13.1
NetJ2_6: J2.6 R15.1 | length 11.7
  Top Layer w0.254: J2.6 22.479,68.243 24.086,69.85 27.94,69.85 28.784,69.006 28.784,68.371 R15.1
NetJ4_1: J4.1 S3.2 S4.1 | length 90.2
  Top Layer w0.254: J4.1 23.432,95.758 41.148,95.758 43.815,98.425 43.815,116.332 45.691,118.208 S3.2 58.293,120.396 60.706,117.983 76.857,117.983 81.175,122.301 S4.1
NetJ4_2: J4.2 S5.2 S6.1 | length 43.2
  Top Layer w0.254: J4.2 20.733,93.567 18.923,95.377 18.923,116.586 19.812,117.475 22.86,117.475 24.609,119.224 S5.2 S6.1
NetJ4_3: J4.3 S7.2 S8.1 | length 148.2
  Top Layer w0.254: J4.3 44.577,91.567 46.228,93.218 46.228,107.188 47.752,108.712 51.308,108.712 52.324,109.728 52.324,111.477 S7.2@52.295,111.506 ; S7.2 S7.2@52.295,111.506 ; v1(55.245,111.379) 55.118,111.506 S7.2@52.295,111.506 ; v1(61.341,111.379) 61.404,111.316 80.454,111.316 v1(80.518,111.252) ; S8.1 v1@83.312,63.754
  Bottom Layer w0.254: v1(55.245,111.379) v1(61.341,111.379) ; v1@80.264,111.379 83.312,108.331 v1(83.312,63.881)
NetJ4_4: J4.4 S9.2 S10.1 | length 26.9
  Top Layer w0.254: J4.4 23.352,89.678 49.927,89.678 S10.1@50.038,89.789
NetJ6_2: J6.2 R23.1 | length 15.8
  Top Layer w0.254: R23.1 133.096,94.107 134.239,95.25 137.287,95.25 138.953,93.584 J6.2
NetJ6_3: J6.3 R22.1 R24.1 | length 60.7
  Top Layer w0.254: R22.1 136.811,75.406 137.541,74.676 142.748,74.676 143.637,75.565 143.637,77.238 ; J6.3 140.843,94.234 137.414,97.663 133.477,97.663 131.445,95.631 131.445,85.725 133.604,83.566 142.494,83.566 143.637,82.423 143.637,77.238 ; R24.1 146.886,77.089 143.786,77.089 143.637,77.238
NetJ6_4: J6.4 R21.1 | length 37
  Top Layer w0.254: J6.4 144.638,94.884 143.256,96.266 143.256,114.427 145.288,116.459 152.527,116.459 154.559,118.491 R21.1
NetQ1_1: Q1.1 R26.1 | length 17.1
  Top Layer w0.254: Q1.1 172.212,71.755 171.196,70.739 171.196,60.452 172.212,59.436 174.16,59.436 R26.1
NetQ1_3: Q1.3 R24.2 | length 24.3
  Top Layer w0.254: R24.2 150.04,76.835 Q1.3
NetR7_2: R7.2 S3.1 | length 32.4
  Top Layer w0.254: R7.2 37.973,103.632 40.894,106.553 40.894,115.443 43.561,118.11 S3.1
NetR11_2: R11.2 S7.1 | length 88
  Top Layer w0.254: R11.2 34.925,55.245 36.068,56.388 36.068,79.121 43.688,86.741 55.499,86.741 57.658,88.9 57.658,113.665 55.753,115.57 51.054,115.57 50.038,114.554 S7.1
NetR18_1: R18.1 R19.1 | length 22.8
  Top Layer w0.254: R18.1 160.952,30.523 161.671,31.242 161.671,37.592 162.687,38.608 164.084,38.608 165.989,40.513 165.989,43.942 164.973,44.958 R19.1
NetR25_1: R25.1 R27.2
NetS1_1: 
NetS2_1: 
NetS5_1: S5.1
NetS9_1: S9.1
NetS12_1: S12.1
NetS13_1: S13.1
NetS14_1: S14.1
U5V: J6.1 R27.1
"USB DM": R23.2
"USB DP": R22.2
"USB RENUMn": R26.2
pads on no net: IC1.4 IC1.11 IC1.14 IC1.15 IC1.16 IC1.17 IC1.18 IC1.19 IC1.22 IC1.26 IC1.30 IC1.31 IC1.32 IC1.33 IC1.34 IC1.40 IC1.41 IC1.42 IC1.43 IC1.45 IC1.46 J6.MH1 R6.2 R13.2 R15.2 R25.2 S6.2 S10.2

## Other copper
Bottom Layer:
  rectangle net GND: 16.891,24.13 184.658,137.795

## Silkscreen, mask and mechanical layers (free items; w line width, h text height)
Mechanical 1:
  the board outline again, w0.254